# EAGLE board module_interface v106 (EAGLE 9.7.0)
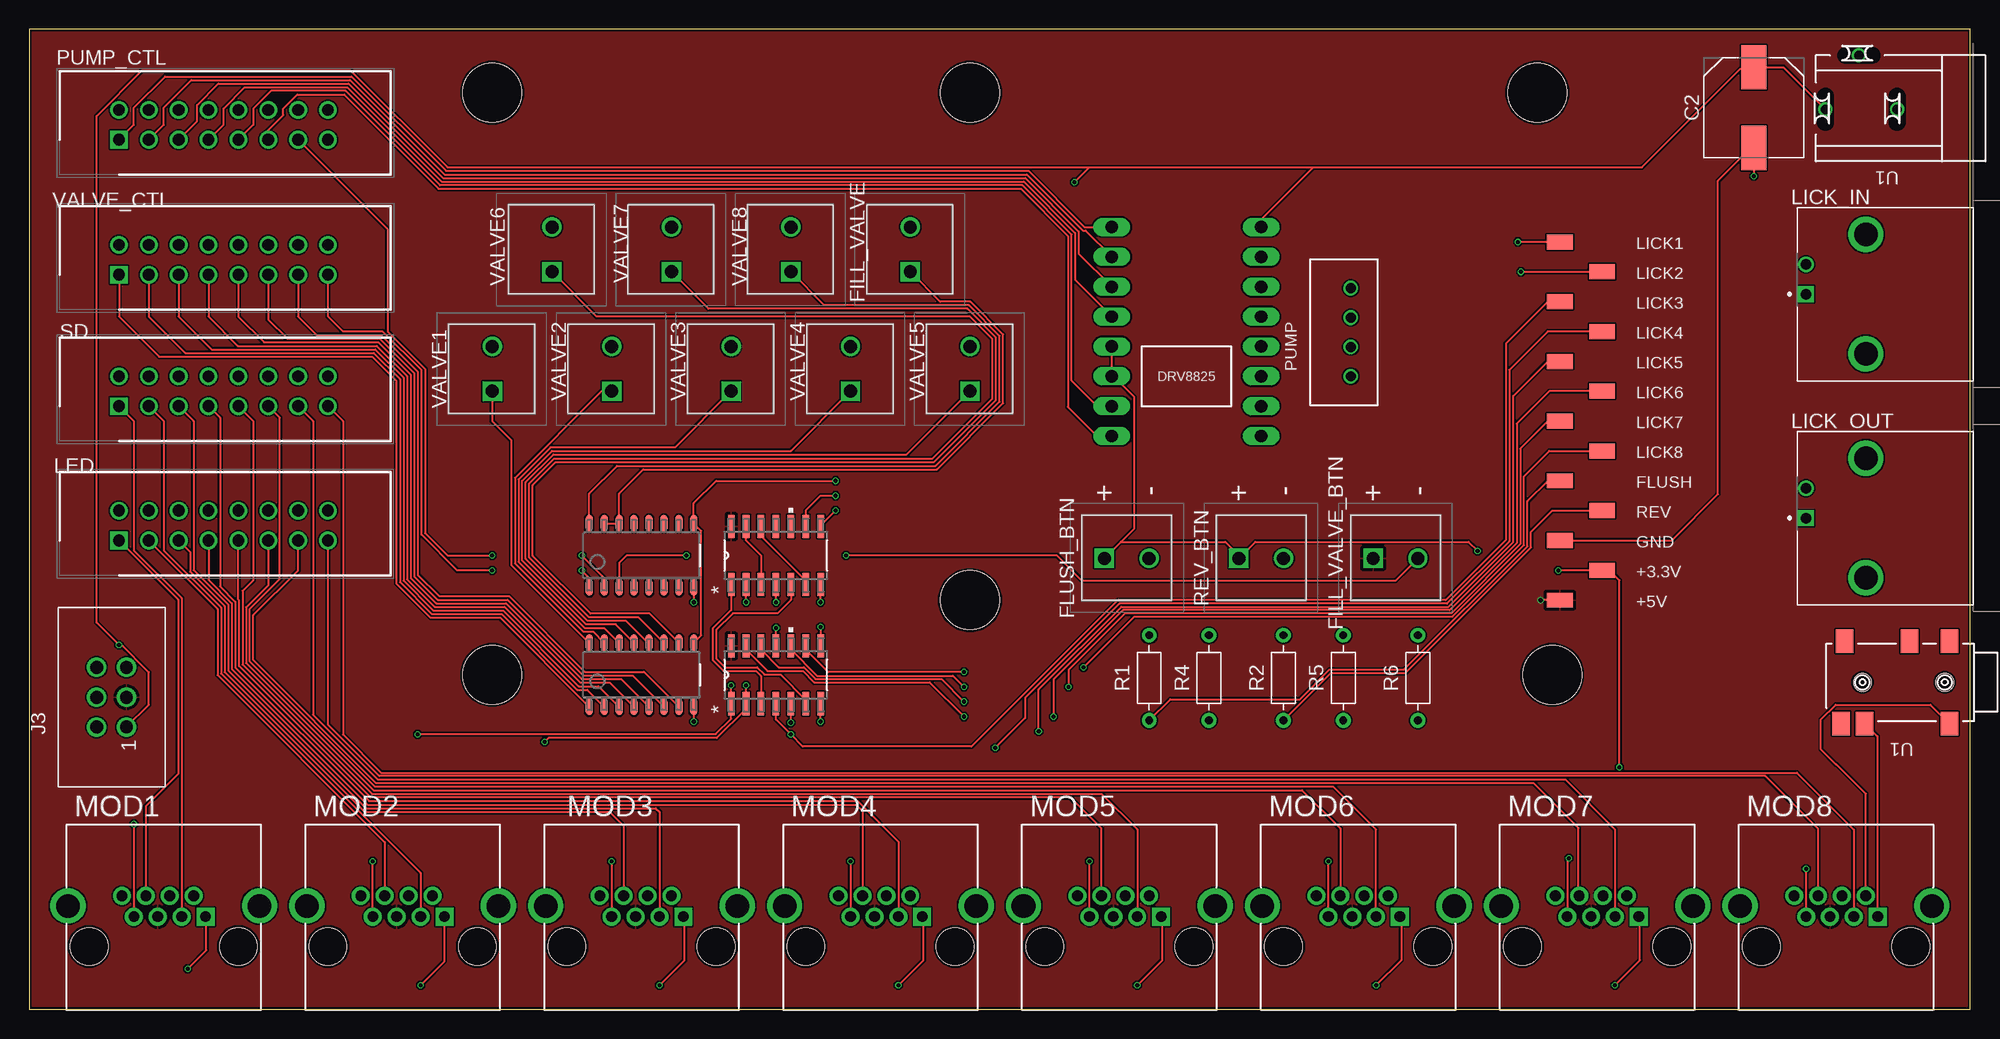
[diagram p0: board, top side]
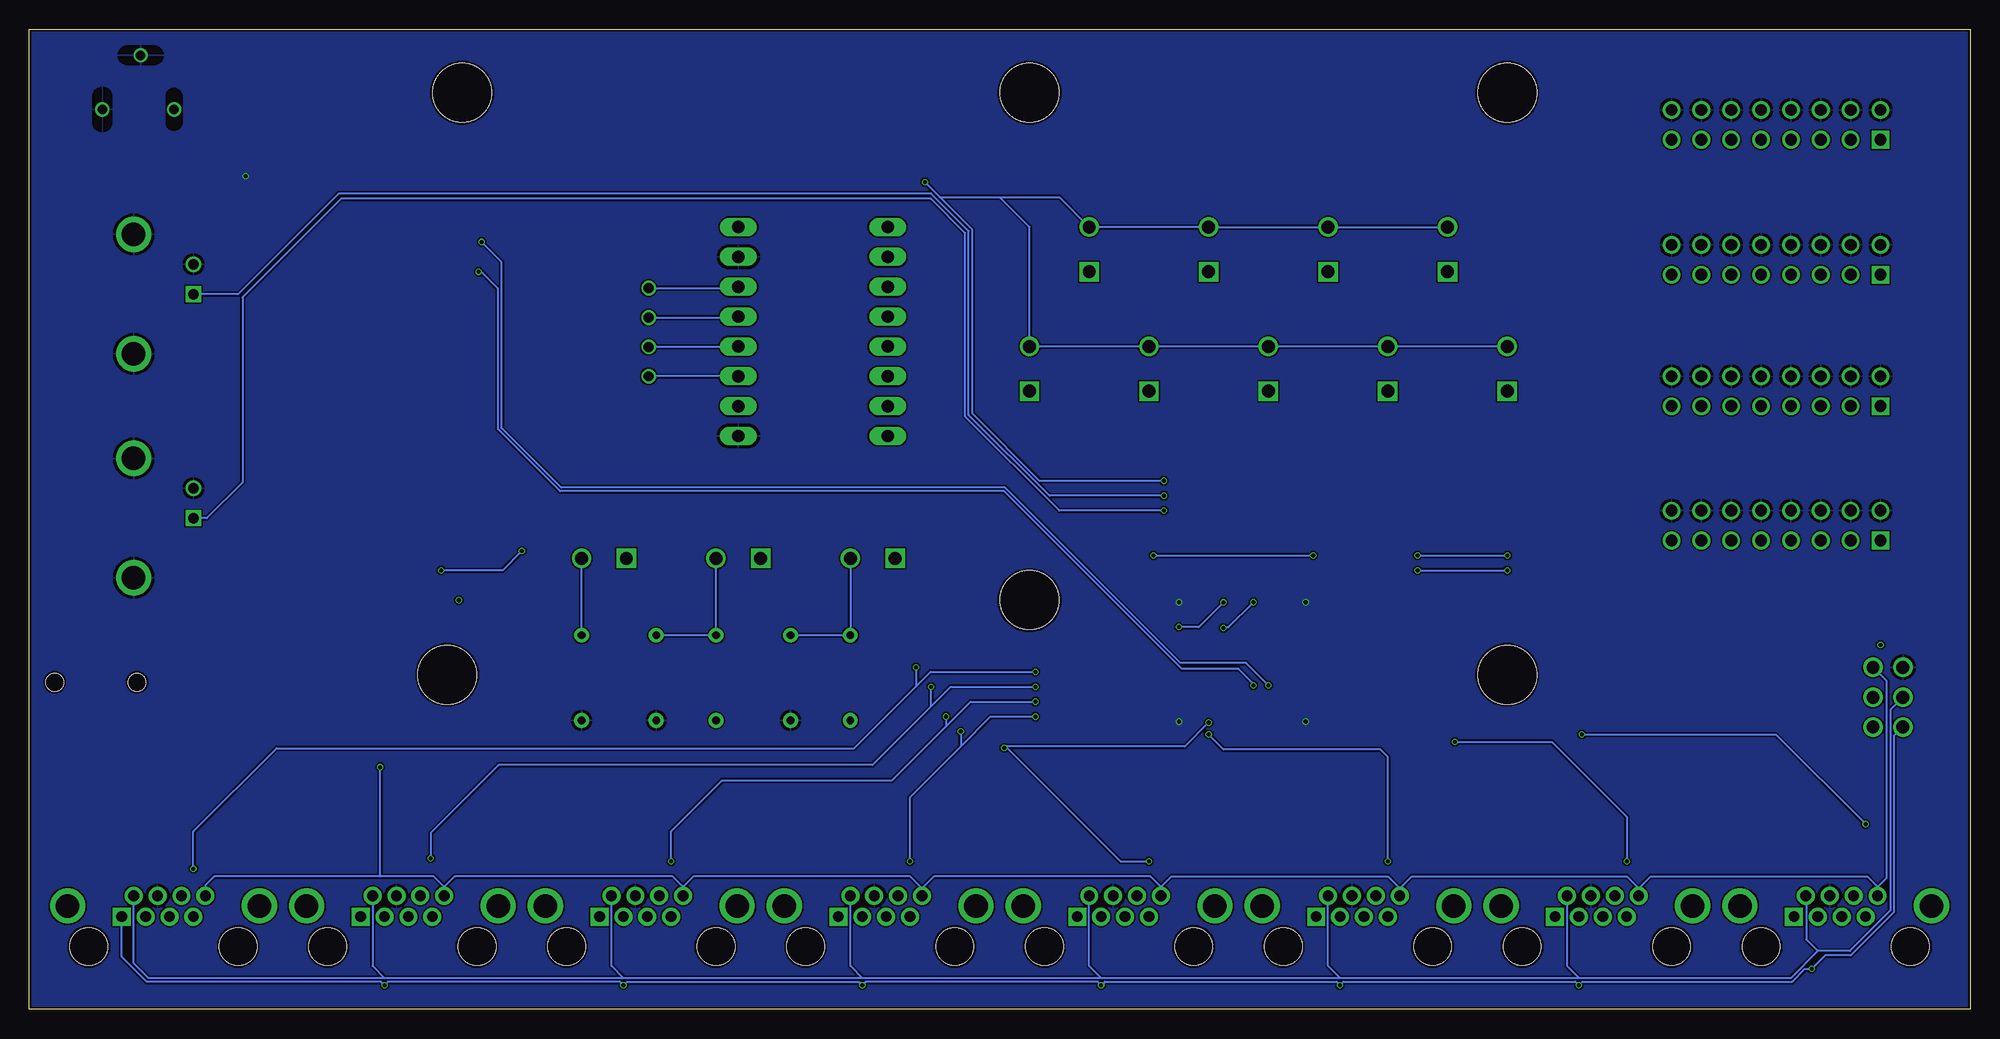
[diagram p1: board, bottom side, seen from below]

Size 165.08 x 83.36 mm. Coordinates in mm from the lower left corner, seen from the top.
Outline: 0,0 165.08,0 165.08,83.36 0,83.36 0,0
Copper layers (1*16): Top / Bottom
Stack-up Default Layer Stack: Top User Defined 0.035559375mm / Dielectric-1 User Defined 1.6mm / Bottom User Defined 0.035559375mm
Design rules: minimum copper width 5mil, minimum drill size 12mil, copper clearance wire_polygon to wire_polygon 5mil, copper clearance wire_polygon to pad_smd 5mil, copper clearance wire_polygon to via 5mil, copper clearance pad_smd to pad_smd 5mil, copper clearance pad_smd to via 5mil, copper clearance via to via 5mil, copper clearance smd to pad (same net) 5mil, copper clearance smd to via (same net) 5mil, copper clearance smd to smd (same net) 5mil, restrict clearance 0mil, dimension clearance 8mil, drill distance 6mil, keepout clearance 0mil
Holes 5 mm at 128.27,77.98 39.37,77.98 129.54,28.45 39.37,28.45 80.01,77.98 80.01,34.8

## Footprints (pad centres in the part's own frame; a part is rotated, then mirrored left to right if it is on the bottom)
PJ-3420-A-SMT = smd 1.5 x 2: 1 2.11,-3.49; 2 2.11,3.51; 3 5.51,-3.49; 4 9.31,3.51; 5 11.31,3.51; 6 11.01,-3.49 | hole 1.5: 2.5,0; 9.5,0
CAPAE830X1050N = smd 3.764 x 2.115: 1 -3.426,0; 2 3.426,0
1727010 = drill 1.1 pad 1.65 square: 1 0,0 | drill 1.1 pad 1.65: 2 3.81,0
61200621621 = drill 1.1: 1 -2.54,-1.27; 2 -2.54,1.27; 3 0,-1.27; 4 0,1.27; 5 2.54,-1.27; 6 2.54,1.27
SHDR16W56P254_2X8_2782X850X950 = drill 1 pad 1.5 square: 1 0,0 | drill 1 pad 1.5: 2 0,2.54; 3 2.54,0; 4 2.54,2.54; 5 5.08,0; 6 5.08,2.54; 7 7.62,0; 8 7.62,2.54; 9 10.16,0; 10 10.16,2.54; 11 12.7,0; 12 12.7,2.54; 13 15.24,0; 14 15.24,2.54; 15 17.78,0; 16 17.78,2.54
LINX_CONBNC002 = drill 0.89 square: 1 0,5.08 | drill 0.89: 2 2.54,5.08 | drill 2: S1 -5.08,0; S2 5.08,0
HC-RJ45-5JA-1-4 = drill 0.914 pad 1.524 square: 1 3.556,0.381 | drill 0.914 pad 1.524: 2 2.54,2.159; 3 1.524,0.381; 4 0.508,2.159; 5 -0.508,0.381; 6 -1.524,2.159; 7 -2.54,0.381; 8 -3.556,2.159 | drill 2 pad 2.54: 9 -8.15,1.3; 10 8.15,1.3 | hole 3.2: -6.35,-2.159; 6.35,-2.159
DC-005-2.5A-2.0 = drill 0.8 slot 3 rotated 90: 1 7.5,4.6; 3 13.6,4.6 | drill 0.8 slot 3: 2 10.75,0
B4B-XH-A = drill 0.84: 1 0,0; 2 2.5,0; 3 5,0; 4 7.5,0
RESAD724W46L381D178B = drill 0.66 pad 1.26: 1 -3.62,0; 2 3.62,0
D14 = smd 1.981 x 0.559: 1 -2.464,3.81; 2 -2.464,2.54; 3 -2.464,1.27; 4 -2.464,0; 5 -2.464,-1.27; 6 -2.464,-2.54; 7 -2.464,-3.81; 8 2.464,-3.81; 9 2.464,-2.54; 10 2.464,-1.27; 11 2.464,0; 12 2.464,1.27; 13 2.464,2.54; 14 2.464,3.81
D0016A_N = smd 1.45 x 0.6: 1 -2.725,4.445; 2 -2.725,3.175; 3 -2.725,1.905; 4 -2.725,0.635; 5 -2.725,-0.635; 6 -2.725,-1.905; 7 -2.725,-3.175; 8 -2.725,-4.445; 9 2.725,-4.445; 10 2.725,-3.175; 11 2.725,-1.905; 12 2.725,-0.635; 13 2.725,0.635; 14 2.725,1.905; 15 2.725,3.175; 16 2.725,4.445
DRV8825 = drill 1.05 long: 1 0,5.08; 2 0,2.54; 3 0,0; 4 0,-2.54; 5 0,-5.08; 6 0,-7.62; 7 0,-10.16; 8 0,-12.7; 9 12.7,5.08; 10 12.7,2.54; 11 12.7,0; 12 12.7,-2.54; 13 12.7,-5.08; 14 12.7,-7.62; 15 12.7,-10.16; 16 12.7,-12.7
X6511WVS-13H-C60D48R2 = smd 1.27 x 2.2: 1 0,0; 2 -2.54,3.6; 3 -5.08,0; 4 -7.62,3.6; 5 -10.16,0; 6 -12.7,3.6; 7 -15.24,0; 8 -17.78,3.6; 9 -20.32,0; 10 -22.86,3.6; 11 -25.4,0; 12 -27.94,3.6; 13 -30.48,0

## Placement (x,y rotation side)
AUDIO  PJ-3420-A-SMT  [PJ-3420-A-SMT]  165.42,27.81 180 top
C2  [CAPAE830X1050N]  146.69,76.71 270 top
FILL_VALVE  1727010  [1727010]  74.93,62.74 90 top
FILL_VALVE_BTN  1727010  [1727010]  114.3,38.35 0 top
FLUSH_BTN  1727010  [1727010]  91.44,38.35 0 top
J3  61200621621  [61200621621]  6.98,26.54 90 top
LED  HIF3FC-16PA-2.54DSA_71_  [SHDR16W56P254_2X8_2782X850X950]  7.62,39.88 0 top
LICK_IN  CONBNC002  [LINX_CONBNC002]  156.21,60.83 90 top
LICK_OUT  CONBNC002  [LINX_CONBNC002]  156.21,41.78 90 top
MOD1  HC-RJ45-5JA-1-4  [HC-RJ45-5JA-1-4]  11.43,7.49 0 top
MOD2  HC-RJ45-5JA-1-4  [HC-RJ45-5JA-1-4]  31.75,7.49 0 top
MOD3  HC-RJ45-5JA-1-4  [HC-RJ45-5JA-1-4]  52.07,7.49 0 top
MOD4  HC-RJ45-5JA-1-4  [HC-RJ45-5JA-1-4]  72.39,7.49 0 top
MOD5  HC-RJ45-5JA-1-4  [HC-RJ45-5JA-1-4]  92.71,7.49 0 top
MOD6  HC-RJ45-5JA-1-4  [HC-RJ45-5JA-1-4]  113.03,7.49 0 top
MOD7  HC-RJ45-5JA-1-4  [HC-RJ45-5JA-1-4]  133.35,7.49 0 top
MOD8  HC-RJ45-5JA-1-4  [HC-RJ45-5JA-1-4]  153.67,7.49 0 top
POWER  DC-005-2.5A-2.0  [DC-005-2.5A-2.0]  166.37,81.15 180 top
PUMP  B4B-XH-A  [B4B-XH-A]  112.39,53.85 90 top
PUMP_CTL  HIF3FC-16PA-2.54DSA_71_  [SHDR16W56P254_2X8_2782X850X950]  7.62,73.98 0 top
R1  22kΩ  [RESAD724W46L381D178B]  95.25,28.19 90 top
R2  22kΩ  [RESAD724W46L381D178B]  106.68,28.19 90 top
R4  22kΩ  [RESAD724W46L381D178B]  100.33,28.19 90 top
R5  22kΩ  [RESAD724W46L381D178B]  111.76,28.19 90 top
R6  22kΩ  [RESAD724W46L381D178B]  118.11,28.19 90 top
REV_BTN  1727010  [1727010]  102.87,38.35 0 top
SD  HIF3FC-16PA-2.54DSA_71_  [SHDR16W56P254_2X8_2782X850X950]  7.62,51.31 0 top
U3  SN74HCT32DRD14  [D14]  63.5,28.45 90 top
U4  SN74HCT32DRD14  [D14]  63.5,38.61 90 top
U5  ULN2003ADRD0016A_N  [D0016A_N]  52.07,28.45 90 top
U6  ULN2003ADRD0016A_N  [D0016A_N]  52.07,38.61 90 top
U$1  DRV8825  [DRV8825]  92.07,61.47 0 top
U$12  X6511WVS-13H-C60D48R2  [X6511WVS-13H-C60D48R2]  130.18,34.8 270 top
VALVE1  1727010  [1727010]  39.37,52.58 90 top
VALVE2  1727010  [1727010]  49.53,52.58 90 top
VALVE3  1727010  [1727010]  59.69,52.58 90 top
VALVE4  1727010  [1727010]  69.85,52.58 90 top
VALVE5  1727010  [1727010]  80.01,52.58 90 top
VALVE6  1727010  [1727010]  44.45,62.74 90 top
VALVE7  1727010  [1727010]  54.61,62.74 90 top
VALVE8  1727010  [1727010]  64.77,62.74 90 top
VALVE_CTL  HIF3FC-16PA-2.54DSA_71_  [SHDR16W56P254_2X8_2782X850X950]  7.62,62.49 0 top

## Library data of the parts
AUDIO = XKB_Connectivity; JLCPCB_PART_NUMBER: C319102; MANUFACTURER: XKB Connectivity; MANUFACTURER_PART_NUMBER: PJ-3420-A-SMT
C2 = Capacitor; CATEGORY: Capacitor
FILL_VALVE FILL_VALVE_BTN FLUSH_BTN REV_BTN VALVE1-VALVE8 = 1727010; DESCRIPTION: Conn PC Terminal Block 2 POS 3.81mm Solder ST Thru-Hole 13.5A; HEIGHT: 8.65mm; MANUFACTURER_NAME: Phoenix Contact; MANUFACTURER_PART_NUMBER: 1727010; MOUSER_PART_NUMBER: 651-1727010; MOUSER_PRICE-STOCK: https://www.mouser.co.uk/ProductDetail/Phoenix-Contact/1727010?qs=JcjeNNoqGSMjtHhQoBJ7UA%3D%3D
J3 = 61200621621
LED PUMP_CTL SD VALVE_CTL = HIF3FC-16PA-2.54DSA; DESCRIPTION: Connector, ribbon cable, straight 16 way Hirose HIF3FC Series, 2.54mm Pitch 16 Way 2 Row Shrouded Straight PCB Header, Through Hole, Solder Termination; HEIGHT: 9.5mm; MANUFACTURER_NAME: Hirose; MANUFACTURER_PART_NUMBER: HIF3FC-16PA-2.54DSA(71); MOUSER_PART_NUMBER: 798-HIF3FC16PA254D71; MOUSER_PRICE-STOCK: https://www.mouser.co.uk/ProductDetail/Hirose-Connector/HIF3FC-16PA-2.54DSA71?qs=eDUdFcBPps1NW3jpaqOZuw%3D%3D
LICK_IN LICK_OUT = CONBNC002; AVAILABILITY: In Stock; CHECK_PRICES: https://www.snapeda.com/parts/CONBNC002/Linx/view-part/?ref=eda; DESCRIPTION: BNC Jack 50 Ohm PCB Through Hole; MF: Linx Technologies Inc.; MP: CONBNC002; PACKAGE: None; PRICE: None; PURCHASE-URL: https://www.snapeda.com/api/url_track_click_mouser/?unipart_id=10849425&manufacturer=Linx Technologies Inc.&part_name=CONBNC002&search_term=None; SNAPEDA_LINK: https://www.snapeda.com/parts/CONBNC002/Linx/view-part/?ref=snap
MOD1-MOD8 = HCTL
POWER = XKB_Connectivity; MANUFACTURER: XKB Connectivity; MANUFACTURER_PART_NUMBER: DC-005-2.5A-2.0
PUMP = Connector; CATEGORY: Header; DSECRIPTION: Connector Header Through Hole 4 position 0.098" (2.50mm); MANUFACTURER: JST Sales America Inc.; MPN: B4B-XH-A(LF)(SN); OPERATING_TEMPERATURE: -25 C to 85 C; PART_STATUS: ACTIVE; PITCH: 0.098" (2.50mm); ROHS_COMPLIANCE: ROHS3 Compliant; SERIES: XH; SUB_CATEGORY: Rectangular Connectors; TYPE: Header, Male Pin, Board to Cable/Wire, Through Hole
R1 R2 R4-R6 = Resistor; CATEGORY: Resistor; SUB-CATEGORY: Fixed
U3 U4 = 2023-12-07_08-39-36_Library; COPYRIGHT: Copyright (C) 2023 Ultra Librarian. All rights reserved.; MANUFACTURER_PART_NUMBER: SN74HCT32DR; MFR_NAME: Texas Instruments
U5 U6 = 2023-12-07_08-28-53_Library; COPYRIGHT: Copyright (C) 2023 Ultra Librarian. All rights reserved.; MANUFACTURER_PART_NUMBER: ULN2003ADR; MFR_NAME: Texas Instruments; REFDES: RefDes; TYPE: TYPE
U$1 = DRV8825
U$12 = X6511WVS-13H-C60D48R2

## Nets
+3.3V: FLUSH_BTN.1 J3.5 MOD1.8 MOD2.8 MOD3.8 MOD4.8 MOD5.8 MOD6.8 MOD7.8 MOD8.8 REV_BTN.1 U$1.5 U$1.6 U$12.2
+5V: FILL_VALVE_BTN.1 J3.3 MOD1.5 MOD2.5 MOD3.5 MOD4.5 MOD5.5 MOD6.5 MOD7.5 MOD8.5 U3.14 U4.14 U$12.1
+12V: C2.1 FILL_VALVE.2 J3.1 POWER.3 U5.9 U6.9 U$1.9 VALVE1.2 VALVE2.2 VALVE3.2 VALVE4.2 VALVE5.2 VALVE6.2 VALVE7.2 VALVE8.2
A+: AUDIO.4 J3.2 MOD1.1 MOD2.1 MOD3.1 MOD4.1 MOD5.1 MOD6.1 MOD7.1 MOD8.1
A-: AUDIO.2 J3.4 MOD1.2 MOD2.2 MOD3.2 MOD4.2 MOD5.2 MOD6.2 MOD7.2 MOD8.2
FILL_VALVE_MAN: FILL_VALVE_BTN.2 R6.2 U6.3
FLUSH: R1.1 U$12.5
GND: C2.2 J3.6 LED.2 LED.4 LED.6 LED.8 LED.10 LED.12 LED.14 LED.16 LICK_IN.2 LICK_IN.S1 LICK_IN.S2 LICK_OUT.2 LICK_OUT.S1 LICK_OUT.S2 MOD1.4 MOD2.4 MOD3.4 MOD4.4 MOD5.4 MOD6.4 MOD7.4 MOD8.4 POWER.1 POWER.2 PUMP_CTL.2 PUMP_CTL.4 PUMP_CTL.6 PUMP_CTL.8 PUMP_CTL.10 PUMP_CTL.12 PUMP_CTL.14 PUMP_CTL.16 R4.1 R5.1 R6.1 SD.2 SD.4 SD.6 SD.8 SD.10 SD.12 SD.14 SD.16 U3.7 U4.7 U5.8 U6.8 U$1.10 U$1.16 U$12.3 VALVE_CTL.2 VALVE_CTL.4 VALVE_CTL.6 VALVE_CTL.8 VALVE_CTL.10 VALVE_CTL.12 VALVE_CTL.14 VALVE_CTL.16
LED1: LED.1 MOD1.6
LED2: LED.3 MOD2.6
LED3: LED.5 MOD3.6
LED4: LED.7 MOD4.6
LED5: LED.9 MOD5.6
LED6: LED.11 MOD6.6
LED7: LED.13 MOD7.6
LED8: LED.15 MOD8.6
LICK1: MOD1.7 U3.1 U$12.13
LICK2: MOD2.7 U3.2 U$12.12
LICK3: MOD3.7 U3.4 U$12.11
LICK4: MOD4.7 U3.5 U$12.10
LICK5: MOD5.7 U3.13 U$12.9
LICK6: MOD6.7 U3.12 U$12.8
LICK7: MOD7.7 U3.10 U$12.7
LICK8: MOD8.7 U3.9 U$12.6
N$1: U5.16 VALVE1.1
N$2: U5.15 VALVE2.1
N$3: U5.14 VALVE3.1
N$4: U5.13 VALVE4.1
N$5: U5.12 VALVE5.1
N$6: U5.11 VALVE6.1
N$7: U5.10 VALVE7.1
N$8: U5.1 VALVE_CTL.1
N$9: U5.2 VALVE_CTL.3
N$10: U5.3 VALVE_CTL.5
N$11: U5.4 VALVE_CTL.7
N$12: U5.5 VALVE_CTL.9
N$13: U5.6 VALVE_CTL.11
N$14: U5.7 VALVE_CTL.13
N$15: U6.1 VALVE_CTL.15
N$16: U6.16 VALVE8.1
N$17: FILL_VALVE.1 U6.14 U6.15
N$18: PUMP_CTL.1 U$1.1
N$19: PUMP_CTL.3 U$1.2
N$20: PUMP_CTL.5 U$1.3
N$21: PUMP_CTL.7 U$1.4
N$22: PUMP_CTL.9 U$1.7
N$23: PUMP_CTL.11 U$1.8
N$24: U3.3 U4.1
N$25: U3.11 U4.2
N$26: U3.8 U4.4
N$27: U3.6 U4.5
N$28: U4.3 U4.13
N$29: U4.6 U4.12
N$30: PUMP.4 U$1.11
N$31: PUMP.3 U$1.12
N$32: PUMP.2 U$1.13
N$33: PUMP.1 U$1.14
N$34: PUMP_CTL.13 U6.2
N$35: LICK_OUT.1 U4.8
N$36: FLUSH_BTN.2 R1.2 R4.2
N$37: R2.2 R5.2 REV_BTN.2
N$38: U4.10
N$39: LICK_IN.1 U4.9
N$40: U4.11
REV: R2.1 U$12.4
SD1: MOD1.3 SD.1
SD2: MOD2.3 SD.3
SD3: MOD3.3 SD.5
SD4: MOD4.3 SD.7
SD5: MOD5.3 SD.9
SD6: MOD6.3 SD.11
SD7: MOD7.3 SD.13
SD8: MOD8.3 SD.15

## Tracks (layer width: path | path; a pad name or v marks a point on that pad's centre or on a via)
+3.3V  (via drill 0.35)
  Top 0.152: U$1.5 U$1.6 92.2,53.85 93.98,52.07 93.98,40.89 FLUSH_BTN.1 92.84,39.75 101.73,39.75 103,38.48 | v130.05,37.34 U$12.2 134.41,37.34 135.25,36.49 v135.25,20.59 | v123.19,38.99 122.42,39.76 104.28,39.76 103,38.48 | REV_BTN.1 103,38.48
  Bottom 0.152: 89.15,10.29 88.14,11.3 69.72,11.3 68.83,10.41 | 89.15,10.29 90.17,11.3 108.58,11.3 109.47,10.41 | 89.15,10.29 MOD5.8 | 68.83,10.41 67.94,11.3 49.53,11.3 48.51,10.29 | 28.19,10.29 29.21,11.3 47.5,11.3 48.51,10.29 | 7.87,10.41 8.76,11.3 27.18,11.3 28.19,10.29 | 7.87,10.41 MOD1.8 | MOD2.8 28.19,10.29 | MOD3.8 48.51,10.29 | MOD4.8 68.83,10.41 | MOD6.8 109.47,10.41 | 109.47,10.41 110.36,11.3 128.91,11.3 129.79,10.41 | MOD7.8 129.79,10.41 | 129.79,10.41 130.68,11.3 135.25,11.3 | 135.25,11.3 149.35,11.3 150.11,10.54 MOD8.8 | v123.19,38.99 124.84,37.34 v130.05,37.34 | 7.87,10.41 7.09,11.2 7.09,27.92 J3.5 | 135.25,11.3 v135.25,20.59
+5V  (via drill 0.35)
  Top 0.152: U$12.1 v128.54,34.8
  pour Top: 165.08,-0.13 0,-0.13 0,83.36 165.08,83.36
+12V  (via drill 0.35)
  Top 0.152: v68.58,44.96 58.42,44.96 56.52,43.05 U6.9 57.15,40.7 57.15,31.81 U5.9 | J3.1 10.16,25.91 10.16,28.67 7.73,31.1 v7.62,30.99 5.71,32.89 5.71,76 9.6,79.88 27.3,79.88 35.56,71.63 90.17,71.63 | 90.17,71.63 109.22,71.63 | 109.22,71.63 137.16,71.63 145.55,80.02 146.57,80.02 C2.1 149.19,80.13 POWER.3 | 109.22,71.63 104.77,67.18 U$1.9 | v88.9,70.36 90.17,71.63
  Bottom 0.152: 87.63,69.09 82.55,69.09 | 82.55,69.09 77.47,69.09 FILL_VALVE.2 VALVE8.2 VALVE7.2 VALVE6.2 | v68.58,44.96 79.15,44.96 84.87,50.68 84.87,66.33 87.63,69.09 | 87.63,69.09 v88.9,70.36 | VALVE1.2 VALVE2.2 VALVE3.2 VALVE4.2 VALVE5.2 80.01,66.55 82.55,69.09
A+  (via drill 0.35)
  Top 0.152: MOD1.1 15.05,7.81 15.05,5.02 v13.46,3.43 | MOD2.1 35.31,4.06 v33.27,2.03 | MOD3.1 55.73,7.77 55.73,4.16 v53.59,2.03 | MOD4.1 76.05,7.77 76.05,4.16 v73.91,2.03 | MOD5.1 96.37,7.77 96.37,4.16 v94.23,2.03 | MOD6.1 116.69,7.77 116.69,4.17 v114.55,2.03 | MOD7.1 137.01,7.77 137.01,4.16 v134.87,2.03 | MOD8.1 157.2,7.9 157.2,23.22 AUDIO.4
  Bottom 0.152: v73.91,2.03 | v73.91,2.03 73.61,2.34 53.9,2.34 v53.59,2.03 53.29,2.34 33.58,2.34 v33.27,2.03 32.97,2.34 15.14,2.34 14.05,3.43 v13.46,3.43 12.32,4.57 10.16,4.57 6.48,8.25 6.48,23.23 J3.2 | v73.91,2.03 74.22,2.34 93.93,2.34 v94.23,2.03 94.49,2.28 114.3,2.28 v114.55,2.03 114.86,2.34 134.57,2.34 v134.87,2.03 135.18,2.34 155.12,2.34 157.23,4.45 MOD8.1
A-
  Top 0.152: AUDIO.2 161.71,25.91 153.65,25.91 152.4,24.66 152.4,22.1 153.67,20.83 153.71,20.83 156.21,18.32 MOD8.2
  Bottom 0.152: 53.57,2.64 54.61,3.68 MOD3.2 | 73.89,2.64 74.93,3.68 MOD4.2 | 94.21,2.64 95.25,3.68 MOD5.2 | 94.21,2.64 114.53,2.64 | 114.53,2.64 115.57,3.68 MOD6.2 | 134.85,2.64 135.89,3.68 MOD7.2 | 12.95,4.95 10.23,4.95 6.79,8.39 6.79,25.47 J3.4 | 33.25,2.64 15.26,2.64 12.95,4.95 | 33.25,2.64 53.57,2.64 | 53.57,2.64 73.89,2.64 | 73.89,2.64 94.21,2.64 | 114.53,2.64 134.85,2.64 | 134.85,2.64 154.95,2.64 156.21,3.91 MOD8.2 | MOD2.2 34.27,9.63 34.27,3.66 33.25,2.64 | MOD1.2 13.95,9.63 13.95,5.94 12.95,4.95
FILL_VALVE_MAN  (via drill 0.35)
  Top 0.152: v55.88,38.61 50.8,38.61 50.16,37.97 U6.3 | v69.47,38.61 87.39,38.61 89.55,36.45 116.2,36.45 FILL_VALVE_BTN.2
  Bottom 0.152: v69.47,38.61 v55.88,38.61 | R6.2 FILL_VALVE_BTN.2
FLUSH
  Top 0.152: U$12.5 129.16,44.96 127.43,43.23 127.43,39.38 116.93,28.89 110.6,28.89 108.08,26.37 97.05,26.37 R1.1
GND  (via drill 0.35)
  Top 0.152: v67.31,34.62 U4.7 | v67.31,24.46 U3.7 | U6.8 v56.52,34.63 | U5.8 v56.52,24.47 | C2.2 146.69,73.15 | 146.69,73.15 v146.69,70.87 | U$12.3 139.7,39.88 143.64,43.81 143.64,70.48 146.3,73.15 146.69,73.15
  pour Bottom: 165.08,-0.13 0,-0.13 0,83.36 165.08,83.36
LED1
  Top 0.152: LED.1 12.65,34.85 12.65,20.02 9.91,17.27 MOD1.6
LED2
  Top 0.152: LED.3 16,34.04 16,28.43 30.23,14.21 MOD2.6
LED3
  Top 0.152: LED.5 13.66,38.91 13.66,37.23 16.61,34.29 16.61,28.69 28.51,16.79 49.35,16.79 50.55,15.59 MOD3.6
LED4
  Top 0.152: LED.7 15.24,36.52 17.22,34.54 17.22,28.94 28.76,17.4 70.33,17.4 70.87,16.86 MOD4.6
LED5
  Top 0.152: MOD5.6 91.19,15.37 88.54,18.01 29.01,18.01 17.83,29.19 17.83,34.79 17.78,34.84 LED.9
LED6
  Top 0.152: LED.11 20.32,36.07 18.44,34.19 18.44,29.44 29.27,18.62 108.25,18.62 111.51,15.37 MOD6.6
LED7
  Top 0.152: LED.13 22.86,37.34 19.05,33.53 19.05,29.7 29.52,19.23 127.96,19.23 131.78,15.42 131.78,9.7 MOD7.6
LED8
  Top 0.152: MOD8.6 152.15,15.34 147.65,19.84 29.77,19.84 25.4,24.21 LED.15
LICK1  (via drill 0.35)
  Top 0.152: v33.02,23.37 33.06,23.41 58.38,23.41 59.69,24.71 U3.1 v59.69,27.56 | v8.89,15.75 MOD1.7 | U$12.13 v126.62,65.28
  Bottom 0.152: v33.02,23.37 16.51,23.37 v8.89,15.75 | v59.69,27.56 61.59,29.46 67.17,29.46 82.08,44.37 119.85,44.37 124.92,49.44 124.92,63.58 v126.62,65.28
LICK2  (via drill 0.35)
  Top 0.152: v43.82,22.73 44.15,23.06 58.47,23.06 60.96,25.55 U3.2 v60.96,27.56 | MOD2.7 v29.21,12.57 | v126.87,62.74 U$12.12
  Bottom 0.152: v43.82,22.73 35.56,22.73 29.21,16.38 v29.21,12.57 | v60.96,27.56 60.96,27.69 62.23,28.96 67.06,28.96 82.17,44.07 119.94,44.07 125.22,49.35 125.22,61.29 126.67,62.74 v126.87,62.74
LICK3  (via drill 0.35)
  Top 0.152: U3.4 63.5,24.64 v64.77,23.37 65.79,22.35 80.14,22.35 92.58,34.8 120.47,34.8 125.6,39.93 125.6,56.64 129.16,60.2 U$12.11 | v49.53,12.57 MOD3.7
  Bottom 0.152: v64.77,23.37 63.5,22.1 50.16,22.1 49.53,21.46 v49.53,12.57
LICK4  (via drill 0.35)
  Top 0.152: v64.77,24.38 U3.5 | v69.85,12.57 MOD4.7 | U$12.10 129.16,57.66 125.88,54.38 125.88,39.81 120.59,34.52 92.73,34.52 84.69,26.48 84.69,24.78 v82.15,22.24
  Bottom 0.152: 82.04,22.35 66.8,22.35 v64.77,24.38 | 82.04,22.35 72.26,12.57 v69.85,12.57 | 82.04,22.35 v82.15,22.24
LICK5  (via drill 0.35)
  Top 0.152: U3.13 60.96,30.59 62.77,28.78 65.79,28.78 66.75,27.81 76.58,27.81 v79.5,24.89 | MOD5.7 v90.17,12.57 | U$12.9 129.16,55.12 126.21,52.17 126.21,39.75 120.71,34.24 92.89,34.24 85.85,27.2 v85.85,23.62
  Bottom 0.152: 85.85,22.35 90.17,18.03 v90.17,12.57 | 85.85,22.35 83.31,24.89 v79.5,24.89 | v85.85,23.62 85.85,22.35
LICK6  (via drill 0.35)
  Top 0.152: U3.12 62.23,30.59 63.74,29.08 65.88,29.08 66.87,28.09 77.57,28.09 v79.5,26.16 | MOD6.7 v110.49,12.57 | U$12.8 129.29,52.58 126.52,49.81 126.52,39.66 120.82,33.96 93.04,33.96 87.12,28.04 v87.12,24.89
  Bottom 0.152: v79.5,26.16 85.01,26.16 87.12,24.05 | v87.12,24.89 87.12,24.05 | v110.49,12.57 110.49,15.11 106.15,19.46 91.72,19.46 87.12,24.05
LICK7  (via drill 0.35)
  Top 0.152: v79.5,27.43 78.56,28.37 66.99,28.37 64.77,30.59 U3.10 | MOD7.7 130.84,7.9 130.84,12.83 v130.94,12.83 | U$12.7 129.16,50.04 126.82,47.7 126.82,39.57 120.94,33.68 93.19,33.68 88.39,28.88 v88.39,27.43
  Bottom 0.152: v79.5,27.43 86.71,27.43 88.39,25.75 | 88.39,25.75 v88.39,27.43 | v130.94,12.83 130.94,14.99 125.15,20.77 93.37,20.77 88.39,25.75
LICK8  (via drill 0.35)
  Top 0.152: v79.5,28.7 79.48,28.68 67.95,28.68 66.04,30.59 U3.9 | MOD8.7 v151.13,11.94 | v89.66,29.08 93.98,33.4 121.05,33.4 127.13,39.48 127.13,45.34 129.29,47.5 U$12.6
  Bottom 0.152: v79.5,28.7 88.41,28.7 89.61,27.51 | v151.13,11.94 151.13,15.11 144.05,22.2 94.92,22.2 89.61,27.51 | 89.61,27.51 89.61,29.03 v89.66,29.08
N$1
  Top 0.152: VALVE1.1 39.37,50.04 41,48.41 41,37.8 U5.16
N$2
  Top 0.152: U5.15 47.94,32.13 47.1,32.13 41.3,37.93 41.3,45.21 48.67,52.58 VALVE2.1
N$3
  Top 0.152: U5.14 48.91,32.43 47.23,32.43 41.61,38.05 41.61,45.08 44.32,47.8 54.91,47.8 VALVE3.1
N$4
  Top 0.152: U5.13 49.87,32.74 47.36,32.74 41.91,38.18 41.91,44.96 44.45,47.5 64.77,47.5 VALVE4.1
N$5
  Top 0.152: U5.12 52.61,31.17 50.74,33.04 47.48,33.04 42.22,38.31 42.22,44.83 44.58,47.19 74.62,47.19 VALVE5.1
N$6
  Top 0.152: U5.11 51.8,33.35 47.61,33.35 42.52,38.43 42.52,44.7 44.65,46.84 76.81,46.84 81.91,51.94 81.91,57.02 80.01,58.93 48.26,58.93 VALVE6.1
N$7
  Top 0.152: U5.10 52.77,33.65 47.73,33.65 42.82,38.56 42.82,44.58 44.78,46.53 76.94,46.53 82.22,51.82 82.22,57.15 79.78,59.59 57.76,59.59 VALVE7.1
N$8
  Top 0.152: VALVE_CTL.1 7.62,58.93 11.02,55.52 29.16,55.52 31.22,53.47 31.22,36.2 34.11,33.31 40.04,33.31 U5.1
N$9
  Top 0.152: VALVE_CTL.3 10.16,58.93 13.26,55.83 29.29,55.83 31.52,53.6 31.52,36.33 34.23,33.62 40.16,33.62 46.6,27.18 47.44,27.18 U5.2
N$10
  Top 0.152: VALVE_CTL.5 12.7,58.93 15.49,56.13 29.42,56.13 31.83,53.72 31.83,36.45 34.36,33.92 40.29,33.92 46.73,27.48 48.41,27.48 U5.3
N$11
  Top 0.152: VALVE_CTL.7 15.24,58.93 17.73,56.44 29.54,56.44 32.13,53.85 32.13,36.58 34.49,34.23 40.42,34.23 46.85,27.79 49.37,27.79 U5.4
N$12
  Top 0.152: VALVE_CTL.9 17.78,58.93 19.96,56.74 29.67,56.74 32.44,53.98 32.44,36.71 34.61,34.53 40.54,34.53 46.98,28.09 50.34,28.09 U5.5
N$13
  Top 0.152: VALVE_CTL.11 20.32,58.68 21.95,57.05 29.8,57.05 32.74,54.1 32.74,36.83 34.74,34.83 40.67,34.83 47.11,28.4 51.3,28.4 U5.6
N$14
  Top 0.152: VALVE_CTL.13 22.86,58.93 24.44,57.35 29.92,57.35 33.05,54.23 33.05,36.96 34.87,35.14 40.8,35.14 47.23,28.7 52.27,28.7 U5.7
N$15  (via drill 0.35)
  Top 0.152: VALVE_CTL.15 25.4,58.93 26.67,57.66 30.05,57.66 33.35,54.36 33.35,40.39 36.4,37.34 v39.37,37.34 | v46.99,37.34 47.62,36.7 U6.1
  Bottom 0.152: v46.99,37.34 v39.37,37.34
N$16
  Top 0.152: U6.16 47.62,43.87 49.98,46.23 77.06,46.23 82.52,51.69 82.52,57.28 79.91,59.89 67.61,59.89 VALVE8.1
N$17
  Top 0.152: U6.15 U6.14 50.16,43.87 52.22,45.92 77.19,45.92 82.83,51.56 82.83,57.4 80.03,60.2 77.47,60.2 FILL_VALVE.1
N$18
  Top 0.152: PUMP_CTL.1 8.89,75.25 8.89,76.71 11.53,79.35 27.41,79.35 35.43,71.32 84.96,71.32 89.74,66.55 U$1.1
N$19
  Top 0.152: PUMP_CTL.3 11.43,75.25 11.43,76.71 13.77,79.05 27.28,79.05 35.31,71.02 84.84,71.02 89.61,66.24 89.84,66.24 U$1.2
N$20
  Top 0.152: PUMP_CTL.5 14.26,75.53 14.26,76.92 16.07,78.74 27.15,78.74 35.18,70.71 84.71,70.71 89.26,66.17 89.26,64.29 U$1.3
N$21
  Top 0.152: PUMP_CTL.7 16.51,75.25 16.51,76.63 18.32,78.44 27.03,78.44 35.05,70.41 84.58,70.41 88.95,66.04 88.95,62.05 U$1.4
N$22
  Top 0.152: PUMP_CTL.9 19.05,75.25 19.05,76.63 20.55,78.13 26.9,78.13 34.93,70.1 84.46,70.1 88.65,65.92 88.65,53.47 90.8,51.31 U$1.7
N$23
  Top 0.152: PUMP_CTL.11 20.32,74.8 21.59,76.07 21.59,76.63 22.79,77.83 26.77,77.83 34.8,69.8 84.33,69.8 88.34,65.79 88.34,51.23 90.8,48.77 U$1.8
N$24
  Top 0.152: U3.3 62.23,28.34 61.79,28.78 59.04,28.78 58.12,29.7 58.12,32.38 59.69,33.95 U4.1
N$25  (via drill 0.35)
  Top 0.152: v60.96,34.62 U4.2 | U3.11 v63.5,32.44
  Bottom 0.152: v60.96,34.62 63.07,32.51 63.43,32.51 v63.5,32.44
N$26  (via drill 0.35)
  Top 0.152: v67.31,32.51 U3.8 | v63.5,34.62 U4.4
  Bottom 0.152: v67.31,32.51 65.61,32.51 v63.5,34.62
N$27
  Top 0.152: U3.6 66.04,26.31 63.87,28.47 62.53,28.47 61.92,29.08 59.16,29.08 58.42,29.83 58.42,32.25 59.85,33.68 63.63,33.68 64.77,34.82 U4.5
N$28
  Top 0.152: U4.3 62.23,38.61 60.96,39.88 U4.13
N$29
  Top 0.152: U4.12 62.23,40.28 66.04,36.47 U4.6
N$30
  Bottom 0.152: PUMP.4 105.68,61.35 105.56,61.47 U$1.11
N$31
  Bottom 0.152: PUMP.3 105.64,58.85 105.56,58.93 U$1.12
N$32
  Bottom 0.152: PUMP.2 105.6,56.35 105.56,56.39 U$1.13
N$33
  Bottom 0.152: U$1.14 PUMP.1
N$34  (via drill 0.35)
  Top 0.152: PUMP_CTL.13 30.48,66.36 30.48,57.66 33.66,54.48 33.66,40.51 35.56,38.61 v39.37,38.61 | v46.99,38.61 48.9,36.7 U6.2
  Bottom 0.152: v46.99,38.61 v39.37,38.61
N$35  (via drill 0.35)
  Top 0.152: U4.8 67.31,41.15 v68.58,42.42
  Bottom 0.152: LICK_OUT.1 149.99,41.78 146.94,44.83 146.94,60.58 138.56,68.95 88.4,68.95 85.48,66.04 85.48,50.43 77.47,42.42 v68.58,42.42
N$36
  Bottom 0.152: R4.2 R1.2 FLUSH_BTN.2
N$37
  Bottom 0.152: R5.2 R2.2 REV_BTN.2
N$39  (via drill 0.35)
  Top 0.152: U4.9 66.04,42.42 67.31,43.69 v68.58,43.69
  Bottom 0.152: LICK_IN.1 147.32,60.83 138.76,69.39 88.37,69.39 85.18,66.2 85.18,50.56 78.31,43.69 v68.58,43.69
REV
  Top 0.152: U$12.4 129.54,42.42 127.74,40.62 127.74,39.3 117.05,28.61 110.71,28.61 R2.1
SD1
  Top 0.152: SD.1 8.89,50.04 8.89,39.04 12.95,34.98 MOD1.3
SD2
  Top 0.152: SD.3 11.43,50.04 11.43,39.04 16.31,34.16 16.31,28.56 33.27,11.59 MOD2.3
SD3
  Top 0.152: SD.5 13.97,50.04 13.97,37.36 16.92,34.41 16.92,28.81 28.63,17.09 53.28,17.09 53.59,16.78 MOD3.3
SD4
  Top 0.152: SD.7 16.22,50.33 16.22,35.97 17.53,34.67 17.53,29.06 28.89,17.7 70.45,17.7 73.91,14.24 MOD4.3
SD5
  Top 0.152: MOD5.3 94.23,15.29 91.21,18.31 29.14,18.31 18.14,29.32 18.14,35.59 19.03,36.48 19.03,50.06 SD.9
SD6
  Top 0.152: SD.11 21.3,50.33 21.3,36.62 18.74,34.06 18.74,29.57 29.39,18.92 110.92,18.92 114.55,15.29 MOD6.3
SD7
  Top 0.152: SD.13 24.13,50.04 24.13,25.05 29.64,19.53 130.63,19.53 134.87,15.29 MOD7.3
SD8
  Top 0.152: SD.15 26.67,50.04 26.67,23.37 29.92,20.12 150.34,20.12 155.19,15.27 MOD8.3

## Text on the board
SilkscreenTop: LICK1 | LICK2 | LICK3 | LICK4 | LICK5 | LICK6 | LICK7 | LICK8 | FLUSH | + | - | + | - | + | - | REV | GND | +3.3V | +5V